# Altium PCB PCB1.PcbDoc (part 1 of 2)
Units mil, origin at the board's own origin, x right, y up, seen from the top; angles counter-clockwise.
Board outline 3937.01 x 3937.01 mil, 2 copper layers (Top Layer, Bottom Layer); 165 components, 130 nets, 568 pads, 491 vias.
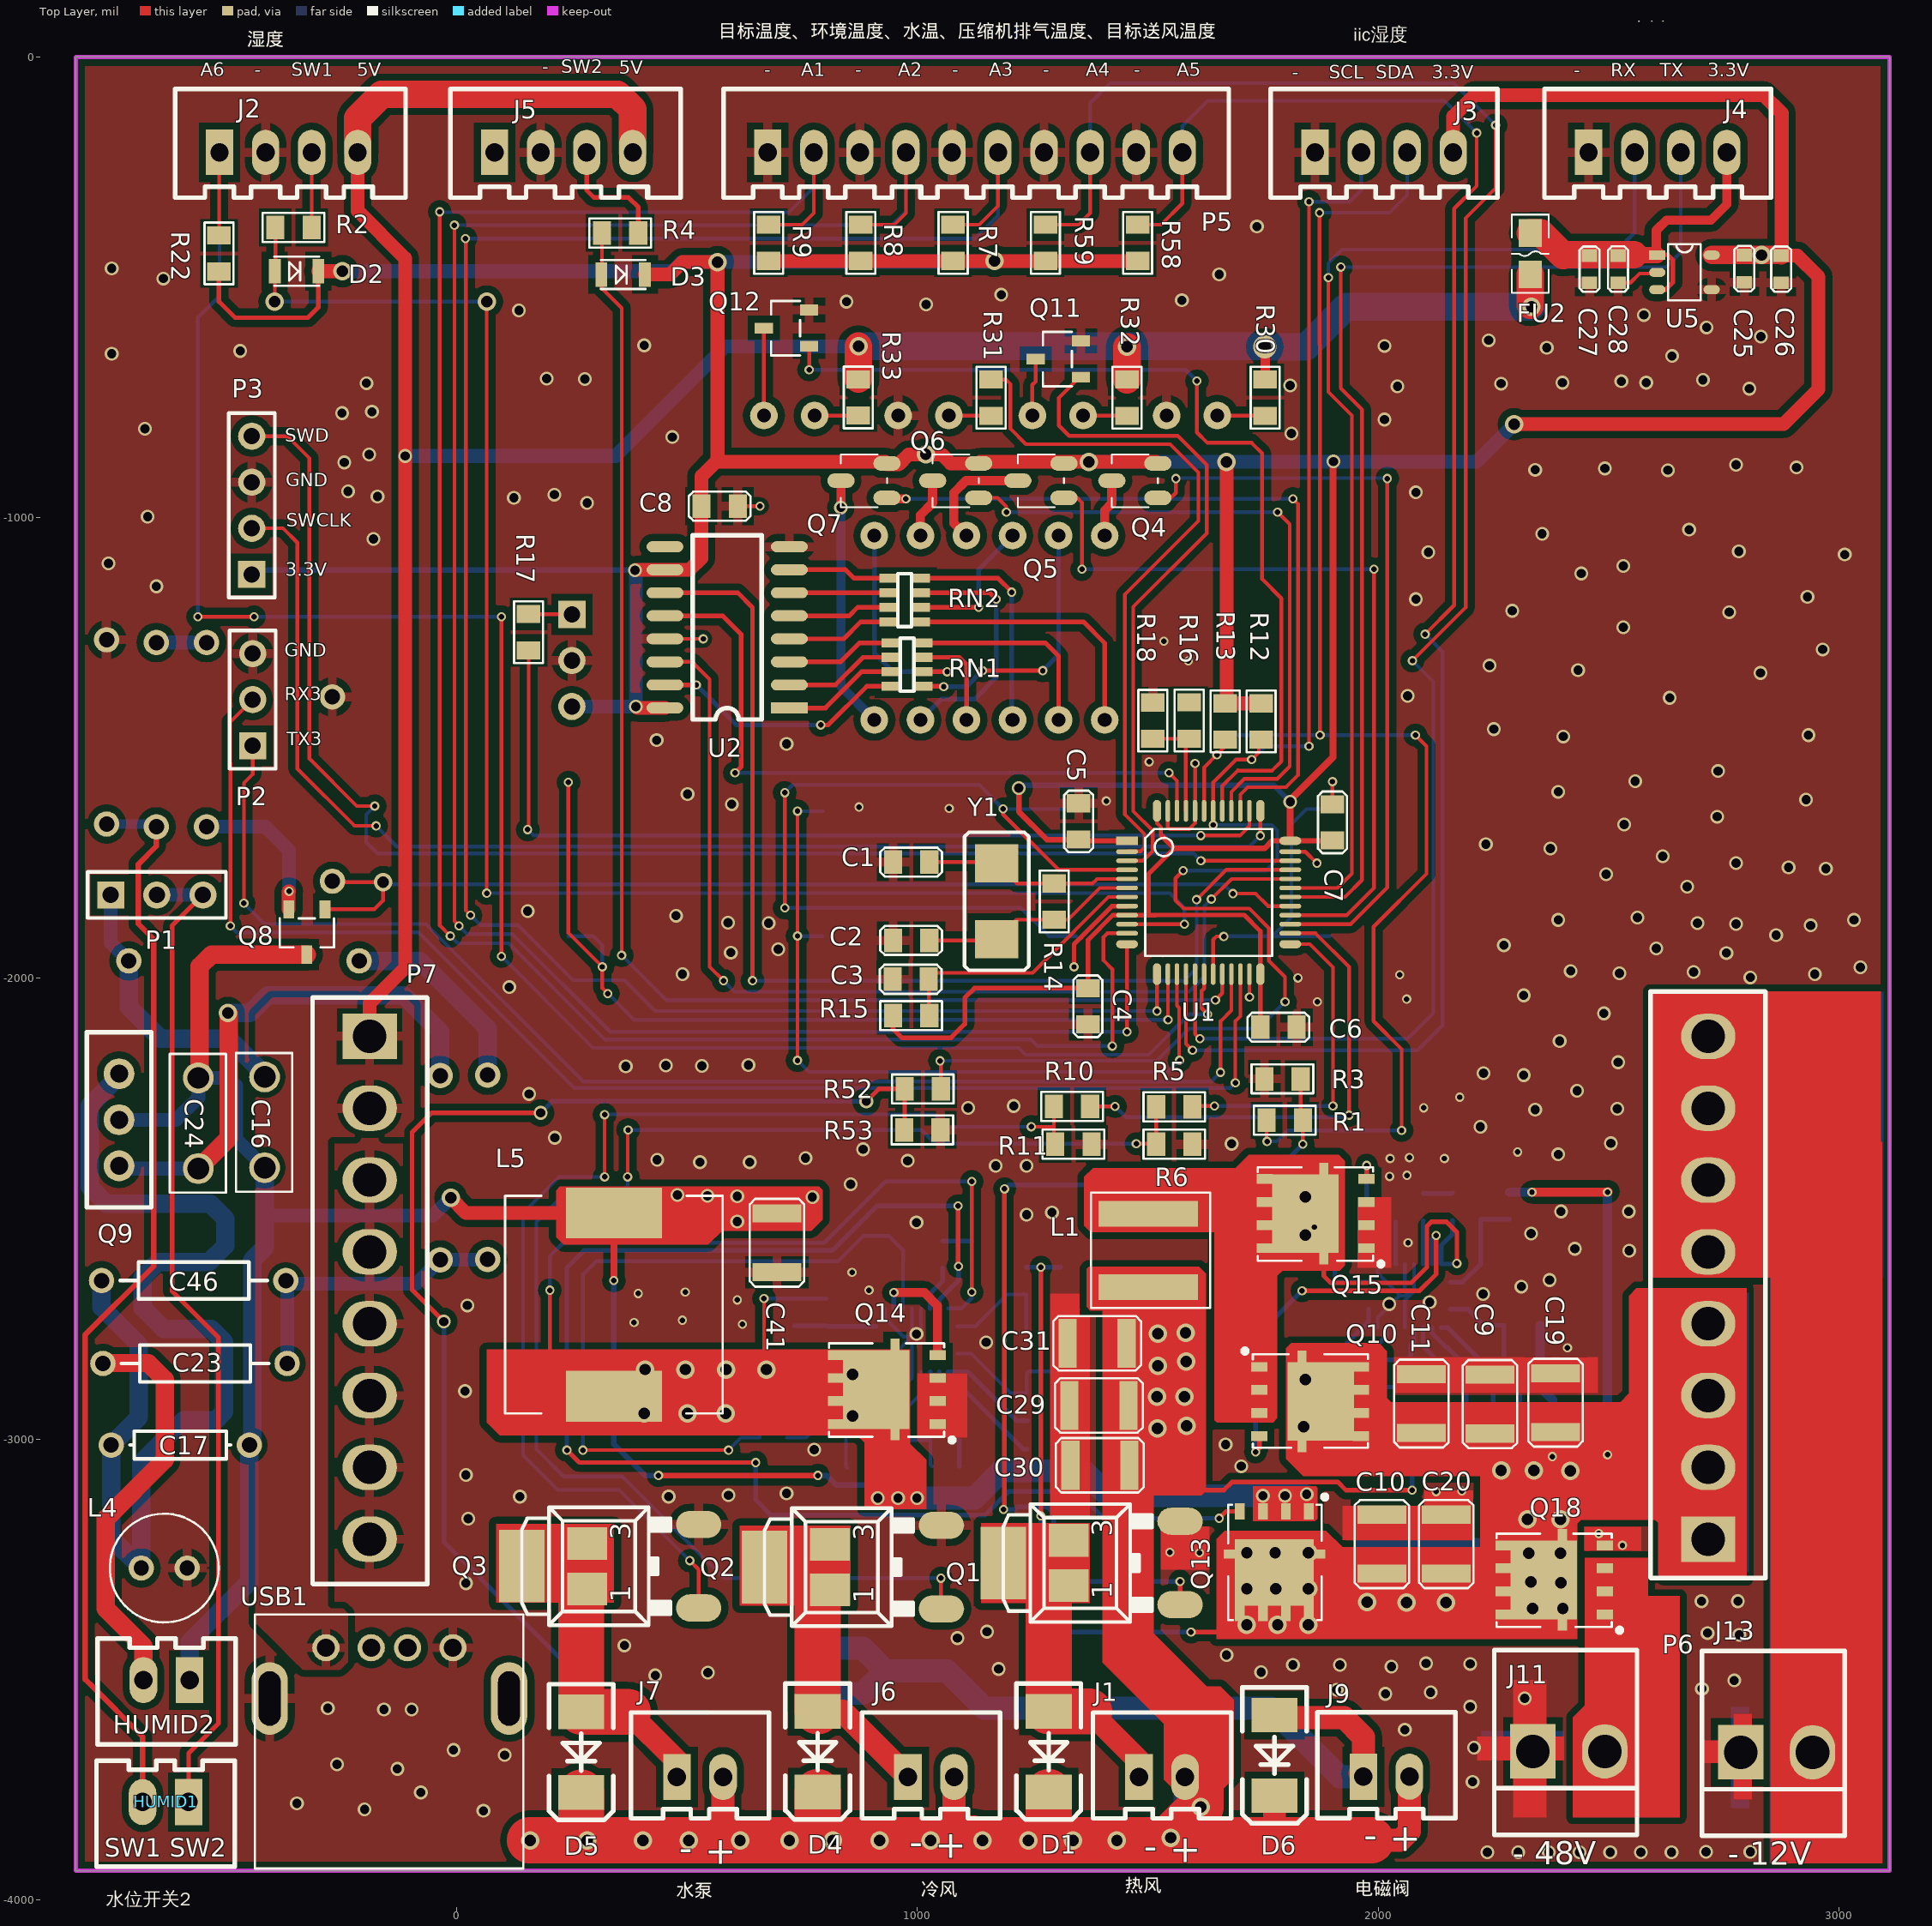
[diagram p0: Top Layer view]
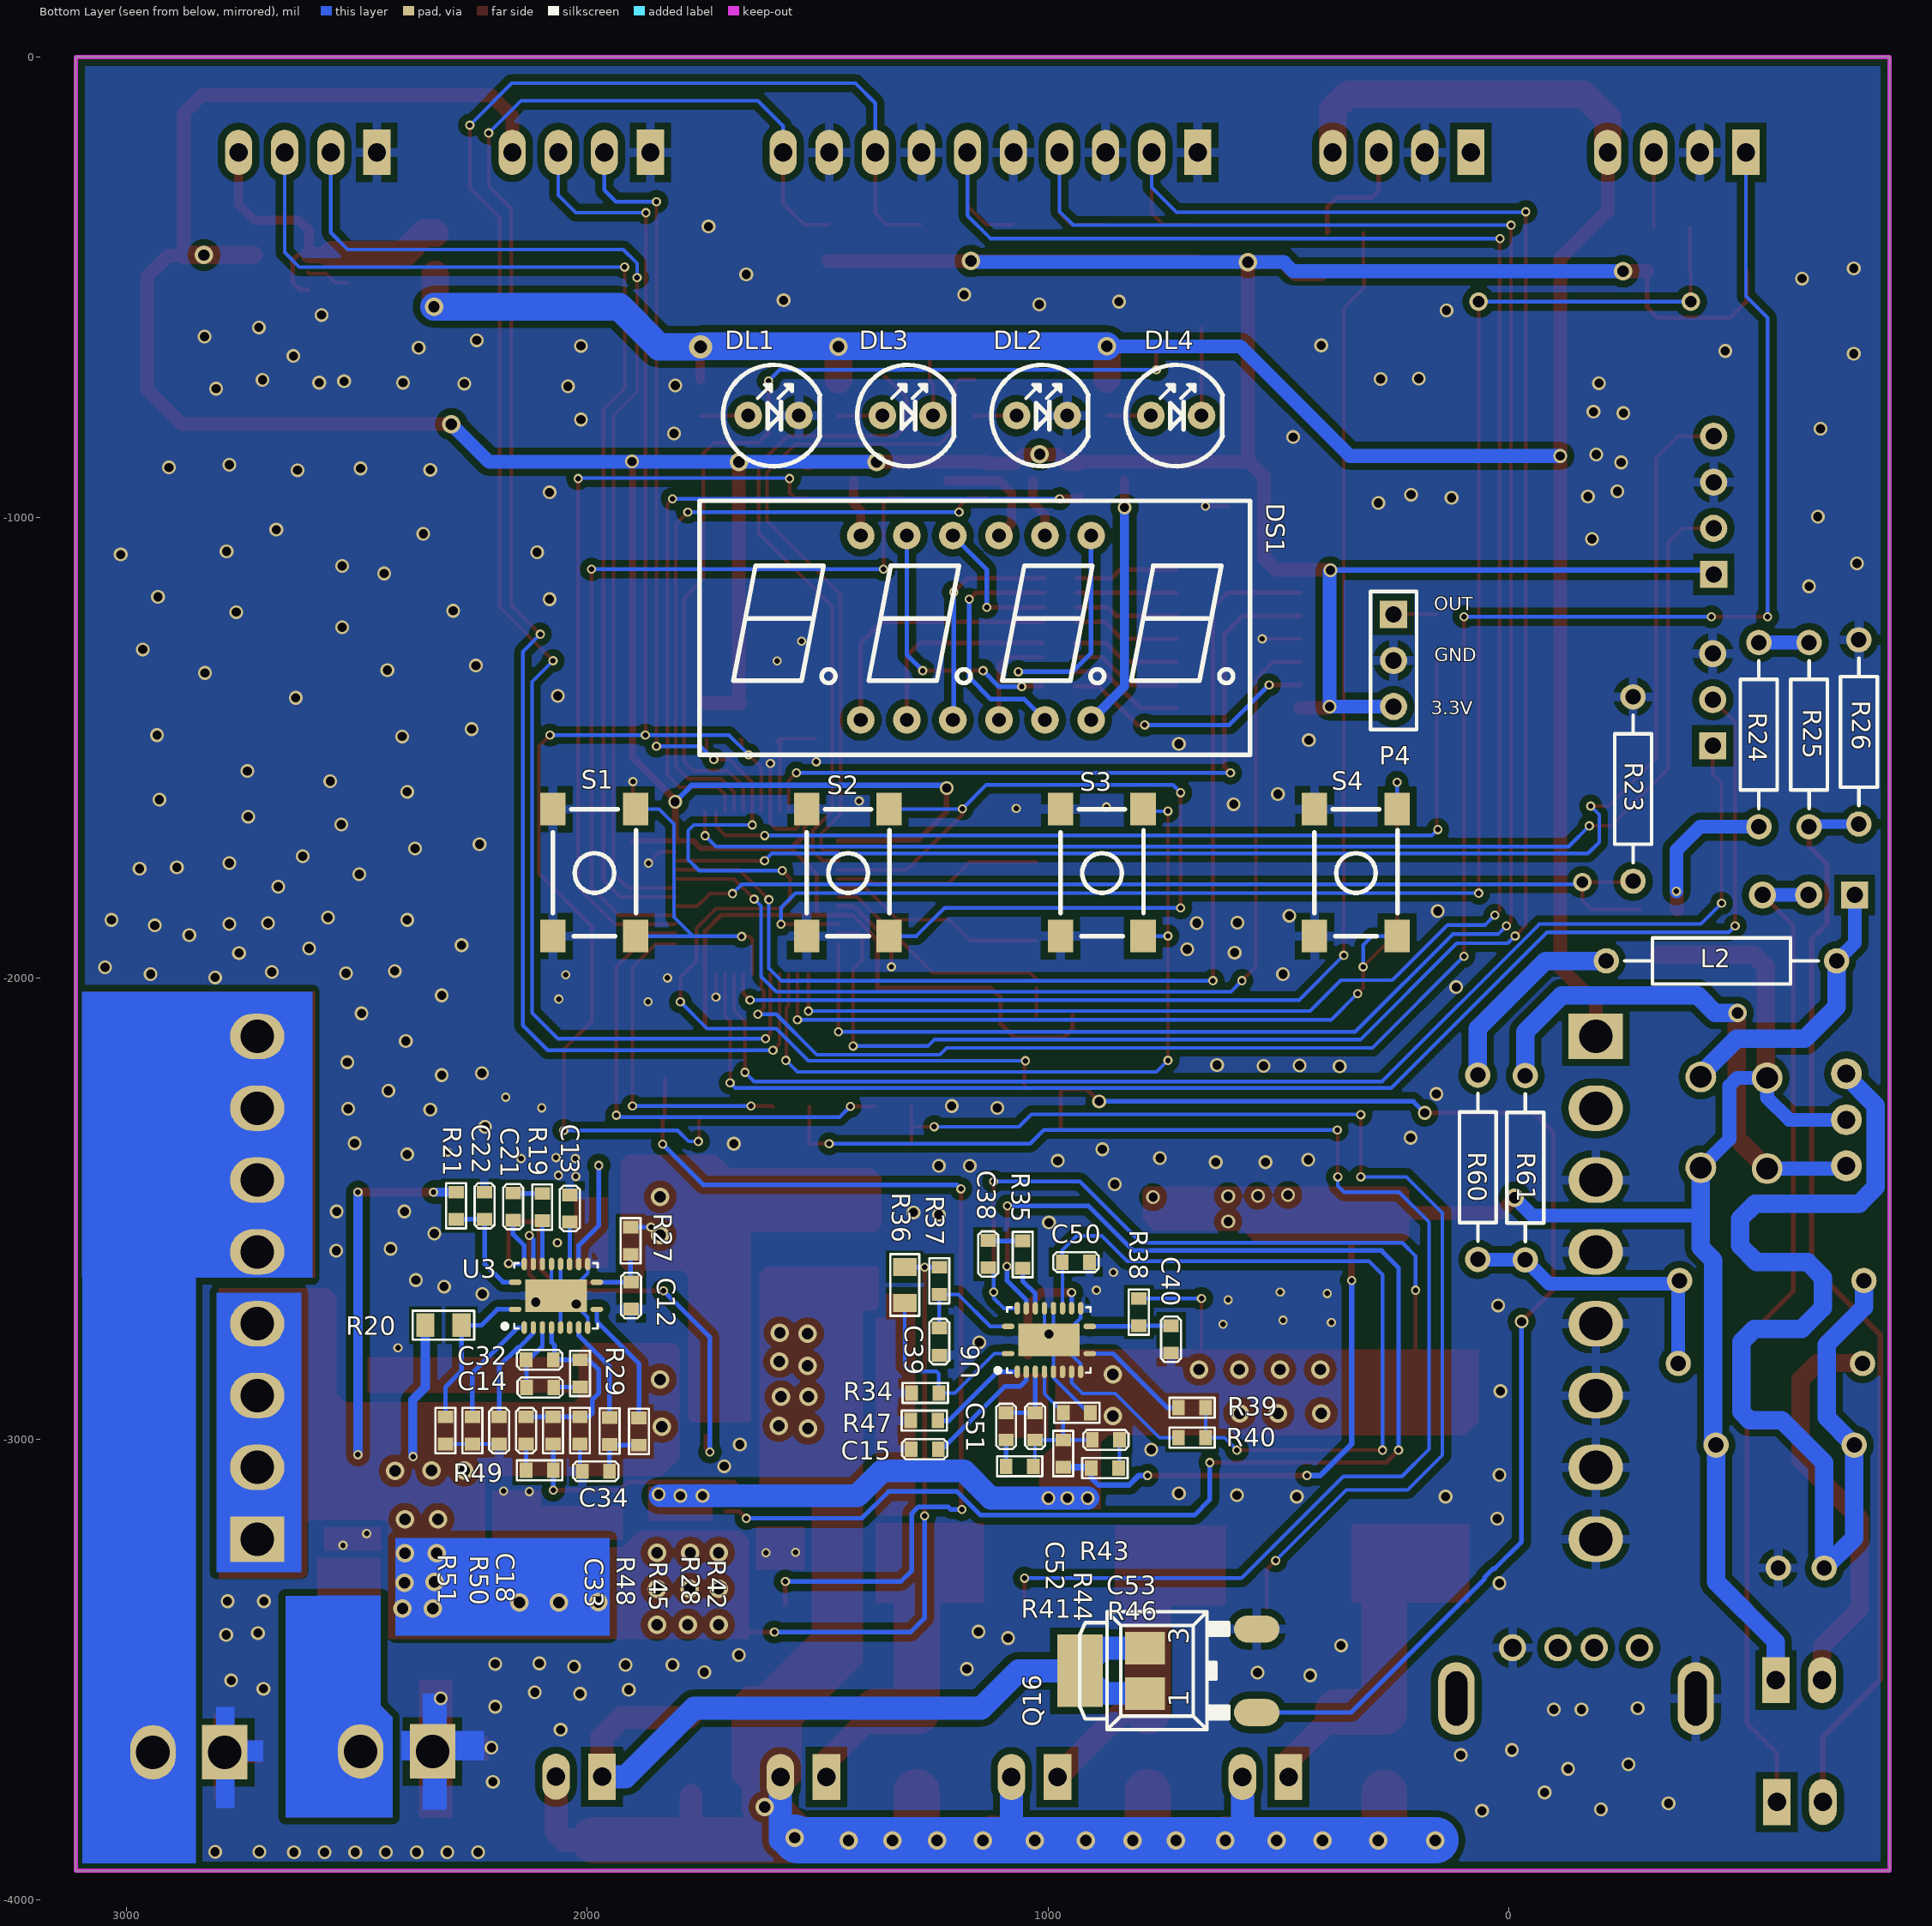
[diagram p1: Bottom Layer view, seen from below]

## Layer stack, top to bottom
Top Layer: signal copper 1.4
Dielectric: dielectric 12.6, FR-4, Dk 4.8
Bottom Layer: signal copper 1.4

## Board outline
-826.77,-3937.01 3110.24,-3937.01 3110.24,0 -826.77,0

## Design rules (kind name [scope] priority, off if disabled: settings)
Clearance Clearance_1 [InPoly And InNet(GND)] p1: gap=15
Clearance [All] p2: gap=5
MinimumSolderMaskSliver [All] p1: minsoldermaskwidth=1
PolygonConnect PolygonConnect_2 [InNet('GND') vs R29] p1: connectstyle=Direct reliefconductorwidth=10 reliefentries=4 polygonreliefangle="90 Angle"
PolygonConnect PolygonConnect_1 [IsVia] p2: connectstyle=Direct reliefconductorwidth=10 reliefentries=4 polygonreliefangle="90 Angle"
PolygonConnect [All] p3: connectstyle=Relief reliefconductorwidth=20 reliefentries=4 polygonreliefangle="90 Angle"
RoutingVias [All] p1: holewidth=28 width=50 viastyle="Through Hole" minholewidth=28 minwidth=50 maxholewidth=28 maxwidth=50
SilkToSilkClearance [All] p1: silktosilkclearance=1
SilkscreenOverComponentPads [All] p1: minsilkscreentomaskgap=1
SolderMaskExpansion [All] p1: expansion=4
Width [All] p1: maxlimit=200 minlimit=6 preferedwidth=10
25 further rules are at their usual default settings.

## Classes and differential pairs
component class POWER: C9 C11 C12 C13 C14 C18 C19 C21 C22 C25 C26 C27 C28 C29 C30 C31 C32 C33 C34 DL1 DL2 DL3 DL4 FU2 J13 L1 P6 P7 Q10 Q11 Q12 Q15 R19 R20 R21 R27 R28 R29 R30 R31 R32 R33 R42 R45 R48 R49 R50 R51 U3 U5 USB1
component class Connector: D1 D2 D3 D4 D5 D6 J1 J2 J3 J4 J5 J6 J7 J9 P5 Q1 Q2 Q3 Q16 R1 R2 R3 R4 R5 R6 R7 R8 R9 R10 R11 R22 R52 R53 R58 R59
component class Display: C8 DS1 Q4 Q5 Q6 Q7 RN1 RN2 S1 S2 S3 S4 U2
component class cpu: C1 C2 C3 C4 C5 C6 C7 P2 P3 P4 R12 R13 R14 R15 R16 R17 R18 R54 R55 U1 Y1
component class Humidifier: C10 C15 C16 C17 C20 C23 C24 C38 C39 C40 C41 C46 C50 C51 C52 C53 HUMID1 HUMID2 J11 L2 L4 L5 P1 Q8 Q9 Q13 Q14 Q18 R23 R24 R25 R26 R34 R35 R36 R37 R38 R39 R40 R41 R43 R44 R46 R47 R60 R61 U6

## Components (designator, comment, footprint, x,y, rotation, side; value= is the part's Value field where it differs from the comment)
C1 "22pF" 0805c 947,-1747.62 r0 top
C2 "22pF" 0805c 947,-1917.62 r0 top
C3 "100nF" 0805c 946,-2002 r0 top
C4 "100nF" 0805c 1370,-2100 r90 top
C5 "100nF" 0805c 1350,-1620 r270 top
C6 "100nF" 0805c 1823,-2106 r180 top
C7 "100nF" 0805c 1901,-1622 r270 top
C8 "10uF" 0805c 610,-975 r180 top
C9 "GRM32ER72A225KA35L" 1210C 2243,-2988 r90 top
C10 "GRM32ER72A225KA35L" 1210C 2008,-3292 r90 top
C11 "GRM32ER72A225KA35L" 1210C 2094,-2987 r90 top
C12 "6.8pF/100V" 0603C 1905,-2718 r90 bottom
C13 "EMK107BB7225MA-T" 0603C 2038,-2529 r90 bottom
C14 "18nF/16V" 0603C 2132,-2888 r180 bottom
C15 "18nF/16V" 0603C 1238,-3022 r0 bottom
C16 "10nF/630V" CAP_5MM -417,-2214 r270 top
C17 "1.5nF/630V" AXIAL-0.3 -600,-3013 r0 top
C18 "18nF/16V" 0603C 2191.25,-2951.94 r270 bottom
C19 "GRM32ER72A225KA35L" 1210C 2385,-2985 r90 top
C20 "GRM32ER72A225KA35L" 1210C 2148,-3292 r90 top
C21 "0.1uF/25V" 0603C 2161,-2466 r270 bottom
C22 "C1608X7S2A104K080AB" 0603C 2223,-2464 r270 bottom
C23 "47nF/630V" AXIAL-0.4 -568,-2836 r180 top
C24 "100p/1000v" CAP_5MM -561,-2216 r270 top
C25 "0.1uF/10V" 0603C 2795,-430 r270 top
C26 "10uF/10V" 0603C 2875,-490 r90 top
C27 "10uF/10V" 0603C 2459,-490 r90 top
C28 "0.1uF/10V" 0603C 2520.92,-430.92 r270 top
C29 "GRM32ER71A476KE15L" 1210C 1458,-2927 r180 top
C30 "GRM32ER71A476KE15L" 1210C 1460,-3057 r180 top
C31 "GRM32ER71A476KE15L" 1210C 1454,-2792 r180 top
C32 "1pF/16V" 0603C 2133,-2828 r180 bottom
C33 "470pF/16V" 0603C 2132.87,-2951.94 r270 bottom
C34 "2.2uF/16V" 0603C 1952,-3070 r0 bottom
C38 "0.1uF/25V" 0603C 1130,-2569 r270 bottom
C39 "C1608X7S2A104K080AB" 0603C 1236,-2818 r90 bottom
C40 "3pF/100V" 0603C 733,-2813 r90 bottom
C41 "GRM32ER71A476KE15L" 1210C 695,-2510 r270 top
C46 "47nF/630V" AXIAL-0.4 -571,-2656 r180 top
C50 "EMK107BB7225MA-T" 0603C 969,-2616 r180 bottom
C51 "22nF/16V" 0603C 1091,-2943 r270 bottom
C52 "1pF/16V" 0603C 1028,-2942.94 r270 bottom
C53 "1.5nF/16V" 0603C 904,-3001.94 r180 bottom
D1 "1N4004" D7227 1284.97,-3591 r270 top
D2 "1N4148" sod323 -395,-465 r0 top
D3 "1N4148" sod323 314,-472 r0 top
D4 "1N4004" D7227 783.49,-3591 r270 top
D5 "1N4004" D7227 270,-3592 r270 top
D6 "1N4004" D7227 1775,-3599 r270 top
DL1 "红" LED-3 1595.74,-778.37 r180 bottom
DL2 "绿" LED-3 1013.06,-778.37 r180 bottom locked
DL3 "黄" LED-3 1304.4,-778.37 r180 bottom locked
DL4 "黄" LED-3 721.72,-778.37 r180 bottom
DS1 "SR410561K" SR410361 1156.49,-1239 r180 bottom locked
FU2 "500mA/6V" F0805 2330,-472 r90 top
HUMID1 "Header 2" SIP-2L -632,-3788 r180 top
HUMID2 "Header 2" SIP-2L -630,-3523 r180 top
J1 "OUT-A" SIP-2L 1531,-3733.5 r0 top
J2 "IIC" SIP-4L -515,-207 r0 top
J3 "IIC" SIP-4L 1863,-207 r0 top
J4 "USRT" SIP-4L 2457,-207 r0 top
J5 "IIC" SIP-4L 82,-207 r0 top
J6 "OUT-B" SIP-2L 1029.5,-3733.5 r0 top
J7 "OUT-C" SIP-2L 528,-3733.5 r0 top
J9 "OUT-C" SIP-2L 2018,-3733 r0 top
J11 "SIP2-2.54" CH3.96-2P 2492,-3678 r0 top
J13 "OUT-B" CH3.96-2P 2943,-3680 r0 top
L1 "XAL6060-682MEB" XAL6060 1501,-2511 r270 top
L2 "100uH" AXIAL-0.5 -461.95,-1962 r180 bottom
L4 "47uH" 6*8 -635,-3280 r180 top
L5 "SRR1210-560M" SRR1210 341,-2907 r90 top
P1 "Header 3" HDR1X3 -751,-1819 r0 top
P2 "Header 3" HDR1X3 -443,-1495 r90 top
P3 "Header 4" HDR1X4 -445,-1123 r90 top
P4 "Header 3" HDR1X3 250,-1210 r270 bottom
P5 "Header 10" SIP-10L 675,-207 r0 top
P6 "Header 8" CH3.96-8P 2716.54,-3217.33 r90 top locked
P7 "Header 8" CH3.96-8P -188.98,-2125.98 r270 top locked
Q1 "NCE4060K" TO-252-3S 1324,-3269 r90 top
Q2 "NCE4060K" TO-252-3S 806,-3278 r90 top
Q3 "NCE4060K" TO-252-3S 279,-3276 r90 top
Q4 "S8550" SOT-23_B 1522,-957 r90 top
Q5 "S8550" SOT-23_B 1318,-957 r90 top
Q6 "S8550" SOT-23_B 1133,-957 r90 top
Q7 "S8550" SOT-23_B 934,-957 r90 top
Q8 "SI2306" SOT23-3 -286,-1850 r90 top
Q9 "BU406" to220 -733,-2407 r90 top
Q10 "BSC117N08NS5ATMA1" "PowerPAK SO-8" 1705,-2817 r0 top
Q11 "S8050" SOT23-3 1355,-695 r0 top
Q12 "S8050" SOT23-3 765,-628 r0 top
Q13 "BSC117N08NS5ATMA1" "PowerPAK SO-8" 1876.17,-3119.72 r270 top
Q14 "BSC037N08NS5ATMA1" "PowerPAK SO-8" 1081,-2994 r180 top
Q15 "BSC037N08NS5ATMA1" "PowerPAK SO-8" 2012,-2612 r180 top
Q16 "NCE4060K" TO-252-3S 793,-3503 r90 bottom
Q18 "SI7489DP" "PowerPAK SO-8" 2530,-3407 r180 top
R1 "22R" 0805R 1758,-2308 r0 top
R2 "10K" 0805R -315,-370 r180 top
R3 "470K" 0805R 1753,-2218 r0 top
R4 "10K" 0805R 394,-382 r180 top
R5 "22R" 0805R 1597,-2279 r180 top
R6 "470k" 0805R 1597,-2359.74 r180 top
R7 "10K" 0805R 1077.5,-364 r270 top
R8 "10K" 0805R 877.25,-364 r270 top
R9 "10K" 0805R 677,-364 r270 top
R10 "22R" 0805R 1375,-2278 r180 top
R11 "470k" 0805R 1378,-2359.74 r180 top
R12 "2K" 0805R 1746,-1403 r270 top
R13 "2K" 0805R 1668,-1403 r270 top
R14 "1MR" 0805R 1297,-1872.62 r90 top
R15 "10K" 0805R 947,-2081 r0 top
R16 "47K" 0805R 1590,-1401 r270 top
R17 "100" 0805R 156,-1288 r90 top
R18 "10K" 0805R 1511,-1480 r90 top
R19 "0" 0603R 2098,-2467 r270 bottom
R20 "121K" 0805R 2273,-2753 r0 bottom
R21 "2.2" 0603R 2285,-2464 r270 bottom
R22 "10K" 0805R -516,-387 r270 top
R23 "4.7K" AXIAL-0.4 -270,-1589 r270 bottom
R24 "1.2K" AXIAL-0.4 -543,-1471 r270 bottom
R25 "1.2K" AXIAL-0.4 -652,-1471 r270 bottom
R26 "4.7K" AXIAL-0.4 -760,-1465 r270 bottom
R27 "1.65K" 0603R 1906,-2540 r270 bottom
R28 "20K" 0603R 1951.75,-2952.94 r270 bottom
R29 "2.37K" 0603R 2016,-2828 r270 bottom
R30 "2K" 0805R 1755,-779 r90 top
R31 "2K" 0805R 1160,-779 r90 top
R32 "2K" 0805R 1455,-779 r90 top
R33 "2K" 0805R 871.63,-778.37 r90 top
R34 "8.06K" 0603R 1296,-2900 r180 bottom
R35 "0" 0603R 1055,-2570 r270 bottom
R36 "121K" 0805R 1311,-2705 r90 bottom
R37 "2.2" 0603R 1236,-2627 r270 bottom
R38 "2.1K" 0603R 803,-2695 r270 bottom
R39 "20K" 0603R 717,-2932 r180 bottom
R40 "20K" 0603R 717,-2997 r180 bottom
R41 "4.99K" 0603R 1032,-3058.94 r0 bottom
R42 "20K" 0603R 1888,-2954 r270 bottom
R43 "665" 0603R 967,-2942.94 r180 bottom
R44 "18K" 0603R 967,-3060.94 r90 bottom
R45 "1.27K" 0603R 2016.12,-2951.94 r270 bottom
R46 "4.64" 0603R 906,-3062.94 r180 bottom
R47 "39.2K" 0603R 1298,-2960 r180 bottom
R48 "18K" 0603R 2074.5,-3011 r90 bottom
R49 "19.1" 0603R 2074,-3068 r0 bottom
R50 "28.7K" 0603R 2249.62,-3011 r90 bottom
R51 "8.06K" 0603R 2308,-3011 r90 bottom
R52 "22R" 0805R 1051,-2240 r180 top
R53 "470k" 0805R 1050,-2329 r180 top
R58 "10K" 0805R 1478,-364 r270 top
R59 "10K" 0805R 1277.75,-442.74 r90 top
R60 "10" AXIAL-0.4 67,-2410 r90 bottom
R61 "2.2" AXIAL-0.4 -36,-2411 r90 bottom
RN1 "8P100R 0603" 8P4R_0603 942.45,-1271.56 r0 top
RN2 "8P100R 0603" 8P4R_0603 937.45,-1131.56 r0 top
S1 "SW-PB" BUTTON_SMT_6*6 1984.96,-1770.5 r90 bottom locked
S2 "SW-PB" BUTTON_SMT_6*6 1434.32,-1770.5 r90 bottom locked
S3 "SW-PB" BUTTON_SMT_6*6 883.14,-1770.5 r90 bottom locked
S4 "SW-PB" BUTTON_SMT_6*6 331.96,-1770.5 r90 bottom locked
U1 "STM32F103C8T6" TQFP-48 1455,-1725 r0 top
U2 "SN74HC595D" SO-16N 765,-1440 r180 top
U3 "LM5145" QFN050P600-8N 2068,-2689 r90 bottom
U5 "TLV70233DBVR" SOT23-5(DBV) 2606,-430 r0 top
U6 "LM5145" QFN050P600-8N 998,-2785 r90 bottom
USB1 "Header 5" USB-A -284,-3453 r0 top
Y1 "8MHz" SMT5032 1172,-1832.62 r90 top

## Footprints (in the part's own frame and the unit in brackets; to place one, negate y for a bottom-side part, rotate by r counter-clockwise, add the part's x,y. Pads: shape width x height; smd on the part's side, far side on the other; paste and mask are expansions set on the pad)
6*8 [mil]
  round 55 hole 33: 1(50,0) 2(-50,0)
  silkscreen extent -118,-118 118,118
8P4R_0603 [mil]
  rect 40x19.68 smd: 1(0,0) 2(70,0) 3(0,-31.49) 4(70,-31.49) 5(0,-62.99) 6(70,-62.99) 7(0,-94.49) 8(70,-94.49)
  silkscreen extent 20,-105 50,10
0603C [mm]
  rect 0.7x0.85 smd: 1(0,0) 2(1.5,0)
  silkscreen extent -0.5,-0.55 2,0.55
0603R [mm]
  rect 0.7x0.85 smd: 1(0,0) 2(1.5,0)
  silkscreen extent -0.5,-0.55 2,0.55
0805c [mm]
  rect 1x1.3 smd: 1(0,0) 2(2,0)
  silkscreen extent -0.7,-0.8 2.7,0.8
0805R [mm]
  rect 1x1.3 smd: 1(0,0) 2(2,0)
  silkscreen extent -0.7,-0.8 2.7,0.8
1210C [mm]
  rect 1x2.7 smd: 1(0,0) 2(3.25,0)
  silkscreen extent -0.8,-1.5 4.05,1.5
AXIAL-0.3 [mm] "Axial Device, Thru-Hole; 2 Leads; 0.3 in Pin Spacing"
  round 1.4 hole 0.85: 1(-3.81,0) 2(3.81,0)
  silkscreen extent -2.77,-0.76 2.77,0.76
AXIAL-0.4 [mm] "Axial Device, Thru-Hole; 2 Leads; 0.4 in Pin Spacing"
  round 1.4 hole 0.85: 1(-5.08,0) 2(5.08,0)
  silkscreen extent -4.06,-1.02 4.06,1.02
AXIAL-0.5 [mm] "Axial Device, Thru-Hole; 2 Leads; 0.5 in Pin Spacing"
  round 1.4 hole 0.85: 1(-6.35,0) 2(6.35,0)
  silkscreen extent -5.33,-1.27 5.33,1.27
BUTTON_SMT_6*6 [mm]
  rect 1.8x1.4 smd paste+0: 1(-3.5,2.275) 1(3.5,2.275) 2(-3.5,-2.275) 2(3.5,-2.275)
  silkscreen extent -3.5,-2.3 3.48,2.27
CAP_5MM [mm]
  round 1.7 hole 1.2: 1(0,0) 2(5,0)
  silkscreen extent -1.32,-1.57 6.32,1.52
CH3.96-2P [mm]
  rect 2.5x3 hole 1.85: 1(-3.96,0)
  oval 2.5x3 hole 1.85: 2(0,0)
  silkscreen extent -6.1,-4.6 1.78,5.59, body extent -5.94,-3.91 1.92,4.59, height 10.9
CH3.96-8P [mm]
  rect 2.5x3 hole 1.85: 1(0,0)
  oval 2.5x3 hole 1.85: 2(3.96,0) 3(7.92,0) 4(11.88,0) 5(15.84,0) 6(19.8,0) 7(23.76,0) 8(27.72,0)
  silkscreen extent -2.14,-3.15 30.2,3.18
D7227 [mil]
  rect 75x100 smd: A(0,0) K(175,0)
  silkscreen extent -60,-70 235,70, body extent -22,-57 194,53, height 88
F0805 [mil]
  rect 60x50 smd: 1(0,0) 2(90,0)
  silkscreen extent -40,-40 130,40, body extent 4,-23 82,24, height 20
HDR1X3 [mm] "Connector; Header; 3 Position"
  rect 1.5x1.5 hole 0.9: 1(0,0)
  round 1.5 hole 0.9: 2(2.54,0) 3(5.08,0)
  silkscreen extent -1.27,-1.27 6.35,1.27
HDR1X4 [mm] "Connector; Header; 4 Position"
  rect 1.5x1.5 hole 0.9: 1(0,0)
  round 1.5 hole 0.9: 2(2.54,0) 3(5.08,0) 4(7.62,0)
  silkscreen extent -1.27,-1.27 8.89,1.27
LED-3 [mil]
  round 60 hole 30: A(-55,0) K(55,0)
  silkscreen extent -110,-110 101,110
"PowerPAK SO-8" [mm]
  rect 0.9x0.54 smd: 1(0.95,-0.67) 2(0.95,-1.94) 3(0.95,-3.21) 4(0.95,-4.48) 5(6.548,-4.48) 6(6.548,-3.21) 7(6.548,-1.94) 8(6.548,-0.67)
  rect 0.5x1.6 smd: 5(3.3,-4.575) 8(3.3,-0.575)
  rect 3.66x2.5 smd: 5(4.325,-3.495)
  rect 3.66x2 smd: 8(4.325,-1.401)
  silkscreen extent 0.03,-5.12 6.93,0.33
QFN050P600-8N [mm]
  oval 0.3x0.7 smd: 1(-0.75,2.25) 10(-0.75,-2.25) 11(0.75,-2.25) 20(0.75,2.25)
  oval 0.7x0.3 smd: 2(-1.75,1.75) 3(-1.75,1.25) 4(-1.75,0.75) 5(-1.75,0.25) 6(-1.75,-0.25) 7(-1.75,-0.75) 8(-1.75,-1.25) 9(-1.75,-1.75) 12(1.75,-1.75) 13(1.75,-1.25) 14(1.75,-0.75) 15(1.75,-0.25) 16(1.75,0.25) 17(1.75,0.75) 18(1.75,1.25) 19(1.75,1.75)
  rect 1.8x3.4 smd: 21(0,0)
  silkscreen extent -1.8,-2.3 1.8,2.94, body extent -1.8,-2.3 1.8,2.3, height 0.8
SIP-2L [mil]
  rect 60x100 hole 40: 1(-50,0)
  oval 60x100 hole 40: 2(50,0)
  silkscreen extent -150,-90 150,140
SIP-4L [mm]
  rect 1.5x2.5 hole 1: 1(0,0)
  oval 1.5x2.5 hole 1: 2(2.54,0) 3(5.08,0) 4(7.62,0)
  silkscreen extent -2.44,-2.5 10.26,3.5
SIP-10L [mm]
  rect 1.5x2.5 hole 1: 1(0,0)
  oval 1.5x2.5 hole 1: 2(2.54,0) 3(5.08,0) 4(7.62,0) 5(10.16,0) 6(12.7,0) 7(15.24,0) 8(17.78,0) 9(20.32,0) 10(22.86,0)
  silkscreen extent -2.44,-2.5 25.43,3.5
SMT5032 [mm]
  rect 2.1x2.4 smd: 1(-2.1,0) 2(2.1,0)
  silkscreen extent -3.81,-1.78 3.81,1.78
SO-16N [mil]
  rect 80x24 smd: 1(43,-27)
  oval 80x24 smd: 2(43,-77) 3(43,-127) 4(43,-177) 5(43,-227) 6(43,-277) 7(43,-327) 8(43,-377) 9(313,-377) 10(313,-327) 11(313,-277) 12(313,-227) 13(313,-177) 14(313,-127) 15(313,-77) 16(313,-27)
  silkscreen extent 103,-402 253,-2, body extent 62,-403 300,3, height 84
sod323 [mm]
  rect 0.65x1.35 smd: A(0,0) K(2.4,0)
  silkscreen extent -0.03,-0.8 2.44,0.8
SOT23-3 [mm]
  rect 1x0.6 smd: 1(0,0) 2(0,2) 3(-2.5,1)
  silkscreen extent -2.1,-0.5 -0.5,2.5
SOT23-5(DBV) [mm]
  rect 0.9x0.5 smd: 1(0,0)
  oval 0.9x0.5 smd: 2(0,-0.95) 3(0,-1.9) 4(3,-1.9) 5(3,0)
  silkscreen extent 0.6,-2.5 2.4,0.6
SOT-23_B [mm]
  oval 0.8x1.5 smd: 1(0,0) 2(1.9,0) 3(0.95,2.54)
  silkscreen extent -0.51,0 2.4,2.54, body extent -0.48,-0.13 2.42,2.67, height 1.2
SR410361 [mil]
  round 60 hole 30: a(-150,200) b(250,200) c(50,-200) com1(-250,200) com2(50,200) com3(150,200) com4(250,-200) d(-150,-200) dp(-50,-200) e(-250,-200) f(-50,200) g(150,-200)
  silkscreen extent -600,-276 595,276, body extent -591,-275 591,276, height 287
SRR1210 [mm]
  rect 2.8x5.3 smd: 1(0,0) 2(10.1,0)
  silkscreen extent -0.95,-6 11.05,6
to220 [mm]
  round 1.7 hole 1: 1(0,0) 2(2.54,0) 3(5.08,0)
  silkscreen extent -2.29,-1.78 7.37,1.78
TO-252-3S [mm]
  oval 1.5x2.5 smd: 1(-2.3,-6.25) 3(2.3,-6.25)
  rect 1.8x2.2 smd: 2(-1.25,-0.1) 2(1.25,-0.1)
  rect 4x2.5 smd: 2(0,3.5)
  silkscreen extent -3.25,-4.7 3.25,3.5
TQFP-48 [mm]
  rect 1.2x0.45 smd: 1(0,0.6)
  oval 1.2x0.25 smd: 2(0,0) 3(0,-0.5) 4(0,-1) 5(0,-1.5) 6(0,-2) 7(0,-2.5) 8(0,-3) 9(0,-3.5) 10(0,-4) 11(0,-4.5) 26(9,-4.5) 27(9,-4) 28(9,-3.5) 29(9,-3) 30(9,-2.5) 31(9,-2) 32(9,-1.5) 33(9,-1) 34(9,-0.5) 35(9,0)
  oval 1.2x0.45 smd: 12(0,-5.1) 25(9,-5.1) 36(9,0.6)
  oval 0.45x1.2 smd: 13(1.65,-6.75) 24(7.35,-6.75) 37(7.35,2.25) 48(1.65,2.25)
  oval 0.25x1.2 smd: 14(2.25,-6.75) 15(2.75,-6.75) 16(3.25,-6.75) 17(3.75,-6.75) 18(4.25,-6.75) 19(4.75,-6.75) 20(5.25,-6.75) 21(5.75,-6.75) 22(6.25,-6.75) 23(6.75,-6.75) 38(6.75,2.25) 39(6.25,2.25) 40(5.75,2.25) 41(5.25,2.25) 42(4.75,2.25) 43(4.25,2.25) 44(3.75,2.25) 45(3.25,2.25) 46(2.75,2.25) 47(2.25,2.25)
  silkscreen extent 1,-5.75 8,1.25
USB-A [mm]
  round 1.5 hole 1: 1(0,0) 2(2.5,0) 3(4.5,0) 4(7,0)
  oval 2x4 hole 1.2 slot 3 at 90 deg: 5(-3.1,-2.8) 6(10.1,-2.8)
  silkscreen extent -3.91,-12.17 10.89,1.83
XAL6060 [mm]
  rect 1.43x5.5 smd: 1(0,0) 2(4.04,0)
  silkscreen extent -1.17,-3.15 5.19,3.41

## Part data
C1 C2 C3 C4 C5 C6 C7 C8: library part CAP, "Capacitor"
C9 C10 C11 C12 C13 C14 C15 C18 C19 C20 C21 C22 C29 C30 C31 C32 C33 C34 C38 C39 C40 C41 C50 C51 C52 C53: library part 0.01UF, "CCX85-103"
C16 C17 C23 C24 C25 C26 C27 C28 C46: library part Cap, "Capacitor"
D1 D4 D5 D6: library part Diode_2, "Default Diode"
D2 D3: library part Diode, "Default Diode"
DL1 DL2 DL3 DL4: library part L-7113SRD-D, "CP-L-7113SRD-D"
DS1: "CP-SR410561K"
FU2: library part FUSE2, "Fuse"
HUMID1 HUMID2: "Header, 2-Pin"
J1 J6 J7 J9 J13: library part CON2, "Connector"
J2 J3 J4 J5: library part SIP4-2.54, "CN-SIP4-2.54"
J11: "CN-SIP2-2.54"
L1 L5: library part INDUCTOR
L2 L4: library part Inductor, "Inductor"
P1 P2 P4: "Header, 3-Pin"
P3: "Header, 4-Pin"
P5: "Header, 10-Pin"
P6 P7: "Header, 8-Pin"
Q1 Q2 Q3 Q16: "NMOSFET"
Q4 Q5 Q6 Q7: library part PNP, "PNP Transistor"
Q8: library part BUK92150-55A, "BUK92150-55A"
Q9 Q11 Q12: library part NPN, "NPN Bipolar Transistor"
Q10 Q13 Q14 Q15 Q18: library part Si4004DY, "Si4004DY"
R1 R2 R3 R4 R5 R6 R7 R8 R9 R10 R11 R22 R30 R31 R32 R33 R52 R53 R58 R59: library part 1K, "CR85-102J"
R12 R13 R14 R15 R16 R17 R18 R19 R27 R29 R35 R38 R41 R43 R44 R45 R46 R48 R49: library part Res3, "Resistor"
R20 R21 R23 R24 R25 R26 R28 R34 R36 R37 R39 R40 R42 R47 R50 R51 R60 R61: library part "Res Semi", "Semiconductor Resistor"
RN1 RN2: library part "8P4R 0603"
S1 S2 S3 S4: "Switch"
U1: "STM32 ARM-based 32-bit MCU with 64 Kbytes Flash, 48-pin LQFP, Industrial Temperature"
U2: "8-Bit Shift Register with 3-State Output Registers"
U5: library part TLV70230DBVR
USB1: "Header, 5-Pin"
Y1: library part XTAL, "Crystal Oscillator"

## Via types
v1: diameter 30, hole 20, Top Layer to Bottom Layer, tented both sides, 241 vias
v2: diameter 20, hole 12, Top Layer to Bottom Layer, tented both sides, 174 vias
v3: diameter 40, hole 25, Top Layer to Bottom Layer, tented both sides, 75 vias
v4: diameter 50, hole 28, Top Layer to Bottom Layer, 1 vias

## Nets (pads, with @x,y where several pads share a name; then routed paths per layer and width w, separated by ;. In a path a pad name is that pad's centre, name@x,y a point inside that pad or via, vN(x,y) a via of type N, cw(c..) or ccw(c..) an arc to the next point about the centre after c; other vN are vias at no path point)
+5V: FU2.1 J2.4 J5.4 P7.1 P7.2 R30.2 R32.2 R33.2 USB1.1 | length 5653.6
  Top Layer w20: v4(1754,-629) 1755,-630 R30.2@1755,-700.26
  Top Layer w30: J2.4@-215,-207 -215,-334 -112,-437 v1(-112,-866) -112,-1977 -188.98,-2053.98 P7.1@-188.98,-2125.98
  Top Layer w60: J2.4@-215,-207 -215,-133 -163,-81 349,-81 382,-114 J5.4@382,-207 ; R33.2@872,-699.26 v3(872,-628) ; R32.2@1455,-700.26 v3(1455,-629) ; v3@2330,-539 FU2.1@2330,-472
  Bottom Layer w30: v1(-112,-866) 345,-866 583,-628 v3(872,-628)
  Bottom Layer w60: v3(872,-628) v4@1754,-628 ; v4(1754,-629) 1844,-629 1931,-542 v3(2333,-542)
+12V: C29.1 C30.1 C31.1 D1.K D4.K D5.K D6.K J1.2 J6.2 J7.2 J9.2 L1.2 R48.1 R49.1 | length 5363.1
  Top Layer w10: 1597,-3100 1608,-3111 1665,-3111 1683,-3093 1912,-3093 1930,-3111 v2(2074,-3111)
  Top Layer w50: 578,-3871 J7.2@578,-3733.5 ; 1079.5,-3871 J6.2@1079.5,-3733.5 ; D6.K@1775,-3774 1775,-3862 1784,-3871 ; 1985,-3871 2048.12,-3871 2068,-3851.12 J9.2@2068,-3733
  Top Layer w100: v3(159,-3871) 262,-3871 ; D5.K@270,-3767 270,-3863 262,-3871 ; v3@613,-3869 v3@611,-3871 ; D4.K@783.49,-3766 783.49,-3863.51 776,-3871 ; 1120,-3867 1116,-3871 ; 1284.97,-3868.03 D1.K@1284.97,-3766 ; 1615,-3677 v3(1615,-3799) v3@1543,-3871 ; 1985,-3871 1784,-3871 v3@1543,-3871 ; 262,-3871 v3(283,-3871) v3(404,-3871) v3(504,-3871) 578,-3871 v3@611,-3871 ; v3@611,-3871 v3(615,-3871) v3(722,-3871) 776,-3871 ; 776,-3871 v3(816,-3871) v3(918,-3871) v3(1029,-3871) 1079.5,-3871 1116,-3871 ; 1116,-3871 v3(1141,-3871) v3(1241,-3871) v3(1338,-3871) v3(1433,-3871) v3@1543,-3871
  Bottom Layer w10: v2(2074,-3111) R49.1@2074,-3068 2074,-3011.5 R48.1@2074.5,-3011
  Bottom Layer w50: 578,-3871 J7.2@578,-3733.5 ; 1079.5,-3871 J6.2@1079.5,-3733.5 ; 1581,-3871 J1.2@1581,-3733.5
  Bottom Layer w100: v3(159,-3871) v3(283,-3871) v3(404,-3871) v3(504,-3871) 578,-3871 v3(615,-3871) v3(722,-3871) v3(816,-3871) v3(918,-3871) v3(1029,-3871) 1079.5,-3871 v3(1141,-3871) v3(1241,-3871) v3(1338,-3871) v3(1433,-3871) 1544,-3871 v3(1549.69,-3865.31)
  other v3: 1521,-2977 1584,-2971 1520,-2908 1580,-2908 1522,-2841 1583,-2832 1522,-2771 1582,-2769
+48V: J11.2 Q18.1 Q18.2 Q18.3
A1: P5.2 R9.1 U1.11 | length 4567.1
  Top Layer w8: v2(-37,-336) -37,-1885 v2(-14,-1908) ; R9.1@677,-364 750,-364 775,-339 P5.2@775,-207 ; v2(1423,-2147) 1423,-1980 1404,-1961 1404,-1910.38 1412.21,-1902.17 U1.11@1455,-1902.17
  Bottom Layer w8: v2@-37,-337 721,-337 775,-283 P5.2@775,-207 ; v2(-14,-1908) 2,-1924 113,-1924 322,-2133 1247,-2133 1261,-2147 1394,-2147 v2(1423,-2147)
A2: P5.4 R8.1 U1.12 | length 4611.2
  Top Layer w8: v2(-5,-365) -5,-1876 v2(5,-1886) ; R8.1@877.25,-364 950,-364 975,-339 P5.4@975,-207 ; 1455,-2106 U1.12@1455,-1925.79
  Bottom Layer w8: v2(-5,-365) 945,-365 975,-335 P5.4@975,-207 ; v2(5,-1886) 23,-1904 121.28,-1904 333.28,-2116 v2(1455,-2116)
A3: P5.6 R7.1 U1.13 | length 4672.7
  Top Layer w8: v2@20,-395 20,-1853 v2(30,-1863) ; R7.1@1077.5,-364 1134,-364 1175,-323 P5.6@1175,-207 ; v2(1519.96,-2071) U1.13@1519.96,-1990.75
  Bottom Layer w8: v2(19,-394) 1125,-394 1175,-344 P5.6@1175,-207 ; v2(30,-1863) 51,-1884 132.48,-1884 252.48,-2004 364,-2004 431,-2071 v2(1519.96,-2071)
A4: P5.8 R59.2 U1.17 | length 3977.5
  Top Layer w8: R59.2@1277.75,-364 1350,-364 1375,-339 P5.8@1375,-207 ; U1.17@1602.64,-1990.75 1602.64,-2120.64 v2(1613,-2131) ; v2(2074.5,-1310.5) 2190,-1195 2190,-350 2255,-285 v2(2255,-148)
  Bottom Layer w8: P5.8@1375,-207 1375,-100 1418,-57 2164,-57 v2(2255,-148) ; v2(1613,-2131) 2064,-2131 2120,-2075 2120,-1356 v2(2074.5,-1310.5)
A5: P5.10 R58.1 U1.16 | length 3711.8
  Top Layer w8: R58.1@1478,-364 1529,-364 1575,-318 P5.10@1575,-207 ; U1.16@1582.95,-1990.75 1582.95,-2141.95 v2(1597,-2156) ; v2(2102,-1253) 2165,-1190 2165,-329 2214,-280 v2(2214,-165)
  Bottom Layer w8: P5.10@1575,-207 1575,-150 1630,-95 2144,-95 v2(2214,-165) ; v2(1597,-2156) 2086,-2156 2140,-2102 2140,-1291 v2(2102,-1253) v2@2101,-1252
A6: J2.1 R22.1 U1.18 | length 4356.8
  Top Layer w8: v2(-562,-1215) v2(-440,-1215) ; R22.1@-516,-387 -516,-208 J2.1@-515,-207 ; v2(97,-1952) v2(97,-1215) ; U1.18@1622.32,-1990.75 1622.32,-2022 1617,-2027.32 1617,-2065 v2(1630,-2078)
  Bottom Layer w8: v2(-562,-1215) -562,-566 -515,-519 J2.1@-515,-207 ; v2(-440,-1215) v2(97,-1215) ; v2(97,-1952) 296,-2151 1220,-2151 1235,-2166 1501.95,-2166 1589.95,-2078 v2(1630,-2078)
CTR_OUT1: J3.3 R1.1 R13.2 U1.43 | length 3347.8
  Top Layer w8: U1.43@1622.32,-1636.42 1622.32,-1542.27 v2(1650,-1514.59) 1665,-1499.59 1665,-1481.74 R13.2@1668,-1481.74 ; R1.1@1758,-2308 1758,-2353 v2(1759,-2354) ; v2(1873,-338) 1873,-624 1874,-625 v2(1874,-1472) ; v2(2051,-2330) 2051,-2153.85 1990,-2092.85 1990,-1888 2105,-1773 2105,-1496 v2(2081,-1472)
  Bottom Layer w8: v2(1650,-1514.59) 1692.59,-1472 v2(1874,-1472) ; v2(1759,-2354) 1780,-2354 1804,-2330 v2(2051,-2330) ; v2@1873,-1471 v2(1874,-1472) ; v2(1873,-338) 2025,-338 2063,-300 J3.3@2063,-207 ; v2(2081,-1472) v2(1874,-1472)
CTR_OUT2: R5.1 U1.25 | length 720.3
  Top Layer w8: R5.1@1597,-2279 1599,-2277 v2(1645,-2277) ; U1.25@1809.33,-1925.79 1851.79,-1925.79 1902,-1976 v2(1902,-2277)
  Bottom Layer w8: v2(1645,-2277) v2(1902,-2277)
CTR_OUT3: R10.1 U1.26 | length 1047.4
  Top Layer w8: R10.1@1375,-2278 v2(1429,-2278) ; U1.26@1809.33,-1902.17 1864.17,-1902.17 1937,-1975 v2(1937,-2297)
  Bottom Layer w8: v2(1429,-2278) 1452,-2301 v2@1933,-2301
CTR_OUT4: J3.2 R12.2 R52.1 U1.42 | length 3605.4
  Top Layer w8: v2(1049,-2179) 1050,-2179 1051,-2180 R52.1@1051,-2240 ; v2(1577,-1766) 1560,-1783 1560,-1830.48 1578,-1848.48 1720.37,-1848.48 1763,-1891.11 1763,-1962 1798,-1997 v2(1798,-2051) ; v2(1642.01,-1667) U1.42@1642.01,-1636.42 1642.01,-1574.58 1691.55,-1525.04 1707,-1525.04 ; 1698.55,-1525.04 1707,-1525.04 ; R12.2@1741,-1481.74 1741,-1509.54 v2(1725.5,-1525.04) 1707,-1525.04 ; v2(1850,-1496) v2(1850,-314)
  Bottom Layer w8: v2(1049,-2179) 1520,-2179 1590,-2109 1740,-2109 v2(1798,-2051) ; v2@1578.63,-1764.37 v2(1577,-1766) ; 1642,-1766 v2(1577,-1766) ; v2(1642.01,-1667) 1769,-1667 1781,-1679 1781,-1742.37 1757.37,-1766 v2(1577,-1766) ; v2(1725.5,-1525.04) 1754.54,-1496 v2(1850,-1496) ; v2(1850,-314) 1938,-314 1963,-289 J3.2@1963,-207
DIS_COM1: Q4.1 U1.27 | length 1694
  Top Layer w8: Q4.1@1522,-957 1550,-957 1561,-946 v2(1561,-915) ; U1.27@1809.33,-1882.48 1940.52,-1882.48 2020,-1803 v2(2020,-915)
  Bottom Layer w8: v2(1561,-915) 1562,-914 1960,-914 ; 1988,-914 1960,-914 ; v2(2020,-915) 2019,-914 1960,-914
DIS_COM2: Q5.1 U1.28 | length 1720
  Top Layer w8: Q5.1@1318,-957 1347,-957 1357,-967 v2(1357,-1112) ; U1.28@1809.33,-1862.8 1932,-1862.79 1991,-1803.79 v2(1991,-1112)
  Bottom Layer w8: v2(1357,-1112) v2(1991,-1112)
DIS_COM3: Q6.1 U1.40 | length 1446.3
  Top Layer w8: Q6.1@1133,-957 1174,-957 1193,-976 v2(1193,-988) ; U1.40@1681.38,-1636.42 1681.38,-1595.21 1709.54,-1567.04 1780.96,-1567.04 1808,-1540 1808,-1014 v2(1782,-988)
  Bottom Layer w8: v2(1193,-988) 1625,-988 ; 1649,-988 1625,-988 ; v2(1782,-988) 1625,-988
DIS_COM4: Q7.1 U1.39 | length 1665.3
  Top Layer w8: U1.39@1701.06,-1636.42 1701.06,-1600.98 1717,-1585.04 1799.96,-1585.04 1826,-1559 1826,-970 v2(1815,-959)
  Top Layer w20: Q7.1@934,-957 934,-959 v2(975,-959)
  Bottom Layer w8: v2(975,-959) v2(1815,-959)
GND: C1.1 C2.1 C3.1 C4.1 C5.1 C6.1 C7.1 C8.1 C9.2 C10.2 C11.2 C12.1 C13.2 C15.2 C18.2 C19.2 C20.2 C22.1 C25.2 C26.1 C27.1 C28.2 C29.2 C30.2 C31.2 C34.2 C39.1 C40.1 C41.2 C50.2 DL1.K DL2.K J2.2 J3.1 J4.1 J5.2 J11.1 J13.1 L4.2 P2.3 P3.3 P4.2 P5.1 P5.3 P5.5 P5.7 P5.9 P7.3 P7.4 P7.5 P7.6 P7.7 P7.8 Q1.3 Q2.3 Q3.3 Q11.2 Q12.2 Q14.1 Q14.2 Q14.3 Q15.1 Q15.2 Q15.3 Q16.3 Q18.4 R3.1 R6.1 R11.1 R18.2 R23.1 R26.1 R34.1 R43.2 R45.2 R47.1 R50.1 R51.1 R53.1 S1.1 S2.1 S3.1 S4.1 U1.8 U1.23 U1.35 U1.44 U1.47 U2.8 U2.13 U3.6 U3.9 U3.12 U3.15 U3.16 U3.21 U5.2 U5.4 U6.6 U6.9 U6.12 U6.15 U6.16 U6.21 USB1.4 USB1.5 | length 1947.2
  Top Layer w8: U2.13@452,-1263 v2(535,-1263) ; C8.1@610,-975 v2(658,-975) ; U1.47@1543.58,-1636.42 1543.58,-1671.37 1548,-1675.79 1590.21,-1675.79 1602.64,-1663.36 v2(1602.64,-1533.36) ; v2(1720.75,-2040.75) U1.23@1720.75,-1990.75 ; U1.35@1809.33,-1725 1842,-1725 v2(1867,-1750) ; C7.1@1901,-1622 v2(1901,-1573) ; Q18.4@2492.6,-3230.62 v2(2530.38,-3230.62) v2@2531,-3230 ; C28.2@2520.92,-489.97 2547.65,-489.97 2567.68,-469.94 2603.46,-469.94 U5.2@2606,-467.4
  Top Layer w10: v2(1340,-1975) 1340,-1926 1355,-1911 1355,-1910.79 1422.68,-1843.11 U1.8@1455,-1843.11
  Bottom Layer w8: R43.2@907.94,-2942.94 912.44,-2942.94 988.16,-2867.23 U6.6@988.16,-2853.9 U6.21@988.16,-2794.84 ; U6.9@929.1,-2853.9 929.1,-2836.9 U6.21@981,-2785 ; U6.12@929.1,-2716.1 929.1,-2737.1 970,-2778 U6.21@997,-2778 ; U6.21@988.16,-2769.16 U6.15@988.16,-2716.1 ; U6.21@1007.84,-2775.16 U6.16@1007.84,-2716.1 ; U3.9@1999.1,-2757.9 1999.1,-2736.1 1999,-2736 U3.21@2046,-2689 ; U3.12@1999.1,-2620.1 1999.1,-2640.1 2048,-2689 U3.21@2068,-2689 ; C34.2@2011.06,-3070 2016.12,-3064.93 R45.2@2016.12,-3011 ; U3.6@2058.16,-2757.9 2058.16,-2698.84 U3.21@2068,-2689 ; U3.15@2058.16,-2620.1 2058.16,-2679.16 U3.21@2068,-2689 ; U3.16@2077.84,-2620.1 2077.84,-2679.16 U3.21@2068,-2689 ; C18.2@2191.25,-3011 R50.1@2249.62,-3011 R51.1@2308,-3011
  other v1: 2237.31,-3897 2303.92,-3897 2370.54,-3897 2437.15,-3897 2503.77,-3897 2570.38,-3897 2637,-3897 2712,-3896 2808,-3896 58,-3807 -200,-3804 -347,-3791 -78,-3767 2205,-3744 -129,-3716 -260,-3706 104,-3686 -7,-3675 2208,-3670 2058,-3631 -158,-3587 -98,-3587 -280,-3584 2200,-3581 2318,-3563 2016,-3553 2114,-3550 1910,-3544 2703,-3542 2773,-3524 431,-3513 545,-3507 1746,-3506 1176,-3499 2029,-3494 1815,-3490 1917,-3490 2200,-3488 2104,-3487 1671,-3469 364,-3448 1087,-3432 2784,-3425 2715,-3421 1151,-3418 2702,-3352 2781,-3352 20,-3313 25,-3173 137,-3125 460,-3125 590,-3122 716,-3118 20,-3078 1703,-3059 776,-3023 1669,-3012 18,-2896 1149,-2790 998,-2772 23,-2710 2024,-2707 2112,-2703 2228,-2685 2311,-2669 2372,-2655 2545,-2591 2427,-2587 2332,-2554 998,-2530.01 1237,-2513 1292,-2508 2397,-2506 2544,-2506 855,-2447 1170,-2407 1237,-2407 528,-2399 636,-2399 979,-2396 435,-2394 757,-2390 2391,-2382 882,-2371 1682,-2359 2505,-2358 213,-2346 2222,-2322 2341,-2285 2519,-2283 1110,-2281 1209,-2277 157,-2251 2432,-2244 2316,-2210 2229,-2206 367,-2191 532,-2190 454,-2189 633,-2188 2521,-2182 2394,-2136 2490,-2076 2316,-2037 114,-2019 2808,-1998 490,-1991 2948,-1991 2524,-1989 2685,-1986 2418,-1984 3047,-1976 2756,-1945 595,-1944 698,-1937 2604,-1935 2273,-1928 2864,-1906 2939,-1885 2777,-1882 677,-1880 2693,-1880 589,-1879 2391,-1873 3033,-1873 2563,-1868 476,-1864 154,-1854 2671,-1801 2495,-1774 2972,-1762 2891,-1759 2777,-1750 2618,-1735 2374,-1718 2234,-1709 2534,-1666 2736,-1649 597,-1622 2929,-1612 501,-1600 2391,-1595 2558,-1572 2738,-1550 716,-1491 434,-1483 2402,-1475 2934,-1472 2251,-1459 2633,-1391 2064,-1387 2830,-1337 2434,-1331 2242,-1321 2965,-1286 2532,-1238 2762,-1205 2291,-1202 2082,-1177 2932,-1172 -652,-1149 2441,-1121 2532,-1105 -756,-1099 3013,-1080 2109,-1075 2783,-1073 -181,-1046 2356,-1035 2675,-1026 -671,-998 283,-968 124,-957 -172,-954 212,-950 2082,-945 -236,-943 2629,-897 2341,-896 2492,-893 2908,-891 2777,-885 -244,-880 -190,-863 468,-825 1812,-817 -677,-807 2014,-787 -249,-773 -184,-770 2806,-720 2042,-715 1809,-713 2267,-709 -196,-708 2400,-707 2582,-707 2528,-704 2705,-701 278,-699 195,-698 2638,-649 -749,-644 -470,-638 2366,-631 2014,-627 407,-626 2240,-615 2831,-607 2713,-587 2577,-560 135,-550 1019,-537 846,-531 1574,-528 1182,-516 -637,-481 1655,-472 -749,-459 1737,-368
  other v2: 1612,-3247 1548,-3246 2479,-3205.24 2126,-3114 2182,-3113 2411,-2802 620,-2751 385,-2747 490,-2742 609,-2698 394,-2684 496,-2681 895,-2677 858,-2638 2065,-2574 2025,-2430 2062.5,-2427.5 2026,-2391 2144,-2391 2068,-2389 2303,-2377 2099,-2281 2177,-2258 1868,-2051 2062,-2045 1826,-1999 2047,-1992 1069,-1631 873,-1628 1410,-1615 1503,-1530 1588,-1311 1535,-1268
IR: R17.1 U1.38 | length 2076.4
  Top Layer w8: v2(154,-1677) 156,-1675 156,-1384 ; 156,-1466 156,-1384 ; R17.1@156,-1288 156,-1384 ; v2(1615,-1690) 1677,-1690 1700,-1690 1720.75,-1669.25 U1.38@1720.75,-1636.42
  Bottom Layer w8: v2(154,-1677) 167,-1690 v2@1606,-1690
KEY1: S1.2 U1.19 | length 688.5
  Top Layer w8: U1.19@1642.01,-1990.75 1642.01,-1915.99 1649,-1909 v2(1665,-1909)
  Bottom Layer w8: v2(1665,-1909) 1665.71,-1908.29 1770.71,-1908.29 ; S1.2@1895.39,-1908.29 1770.71,-1908.29 ; S1.2@1895.39,-1632.7 1844.3,-1632.7 1812,-1665 1812,-1867 1770.71,-1908.29
KEY2: S2.2 U1.4 | length 1937.3
  Top Layer w8: v2(712,-1847) v2(712,-1597) ; v2(1186,-1632) 1186,-1644 1306.37,-1764.37 U1.4@1455,-1764.37
  Bottom Layer w8: v2(712,-1847) 1224.41,-1847 1285.7,-1908.29 S2.2@1344.76,-1908.29 ; v2(712,-1597) 729,-1580 1134,-1580 v2(1186,-1632) ; v2@1185.7,-1632.7 1249,-1632.7 ; 1285.7,-1632.7 1249,-1632.7 ; S2.2@1344.76,-1632.7 1249,-1632.7
KEY3: S3.2 U1.15 | length 1693.3
  Top Layer w8: v2(739.67,-2178) v2(739.67,-1908) v2(739.67,-1637) ; U1.15@1563.27,-1990.75 1563.27,-2059.27 1568,-2064 1568,-2177 v2(1569,-2178)
  Bottom Layer w8: v2@735.24,-1908.29 S3.2@793.57,-1908.29 ; v2(739.67,-2178) 764.67,-2203 1544,-2203 v2(1569,-2178) ; v2(739.67,-1637) S3.2@794,-1637
KEY4: S4.2 U1.14 | length 2020.1
  Top Layer w8: v2(242.39,-1574.44) 242.39,-1901.39 v2(316,-1975) 316,-2021 v2(328,-2033) ; U1.14@1543.58,-1990.75 1543.96,-1991.13 v2(1543.96,-2090.04)
  Bottom Layer w8: S4.2@242.39,-1908.29 296.29,-1908.29 316,-1928 v2(316,-1975) ; S4.2@242.39,-1632.7 v2(242.39,-1574.44) ; v2(328,-2033) 385.04,-2090.04 v2(1543.96,-2090.04)
LED_CTRL1: Q11.1 U1.3 | length 1488.4
  Top Layer w8: Q11.1@1355,-695 1352,-695 1307,-740 1307,-800 1329.37,-822.37 1565,-822.37 1628,-885.37 1628,-1034 1468.49,-1193.51 1468.49,-1533 ; U1.3@1455,-1744.68 1489.43,-1744.68 1510.62,-1723.49 1510.62,-1679.27 1468.49,-1637.13 1468.49,-1533 ; 1468.49,-1513.69 1468.49,-1533
LED_CTRL2: Q12.1 U1.41 | length 2065.6
  Top Layer w8: v2(765,-679) Q12.1@765,-628 ; v2(1606.74,-703.26) 1606.74,-814.74 1629.5,-837.5 1725.5,-837.5 1748,-860 1748,-1133 1790,-1175 1790,-1529 1769.96,-1549.04 1696,-1549.04 1695.48,-1548.52 1661.69,-1582.31 U1.41@1661.69,-1636.42
  Bottom Layer w8: v2(765,-679) 1582.48,-679 v2(1606.74,-703.26)
LED_STATUS: R31.2 U1.2 | length 1529.3
  Top Layer w8: R31.2@1160,-700.26 1192.26,-700.26 1202,-710 1202,-807 1235.37,-840.37 1548.37,-840.37 1610,-902 1610,-1007 1450.49,-1166.51 1450.49,-1644.59 1492.62,-1686.72 1492.62,-1716.03 1484.42,-1724.24 1455.76,-1724.24 U1.2@1455,-1725
M74HC595_RCK: U1.46 U2.12 | length 1519.5
  Top Layer w8: v2(1546,-1554) 1563.27,-1571.27 U1.46@1563.27,-1636.42
  Top Layer w10: U2.12@452,-1213 577,-1213 617,-1253 617,-1541 v2(604,-1554)
  Bottom Layer w8: v2(604,-1554) v2(1546,-1554)
M74HC595_SCK: U1.33 U2.11 | length 2391.5
  Top Layer w8: v2(1606,-1829) 1670.63,-1764.37 U1.33@1809.33,-1764.37
  Top Layer w10: U2.11@452,-1163 609.95,-1163 642,-1195.05 v2(642,-2005)
  Bottom Layer w8: v2(642,-2005) 1579,-2005 1606,-1978 1606,-1854 ; v2@1606,-1830 1606,-1854 ; v2(1606,-1829) 1606,-1854